# Altium PCB lab2_kondratchenko_buck_boost.PcbDoc
Units mm, origin at the board's own origin, x right, y up, seen from the top; angles counter-clockwise.
Board outline 55 x 30 mm, 2 copper layers (Top Layer, Bottom Layer), stack 1.536 mm thick; 21 components, 13 nets, 65 pads, 106 vias.
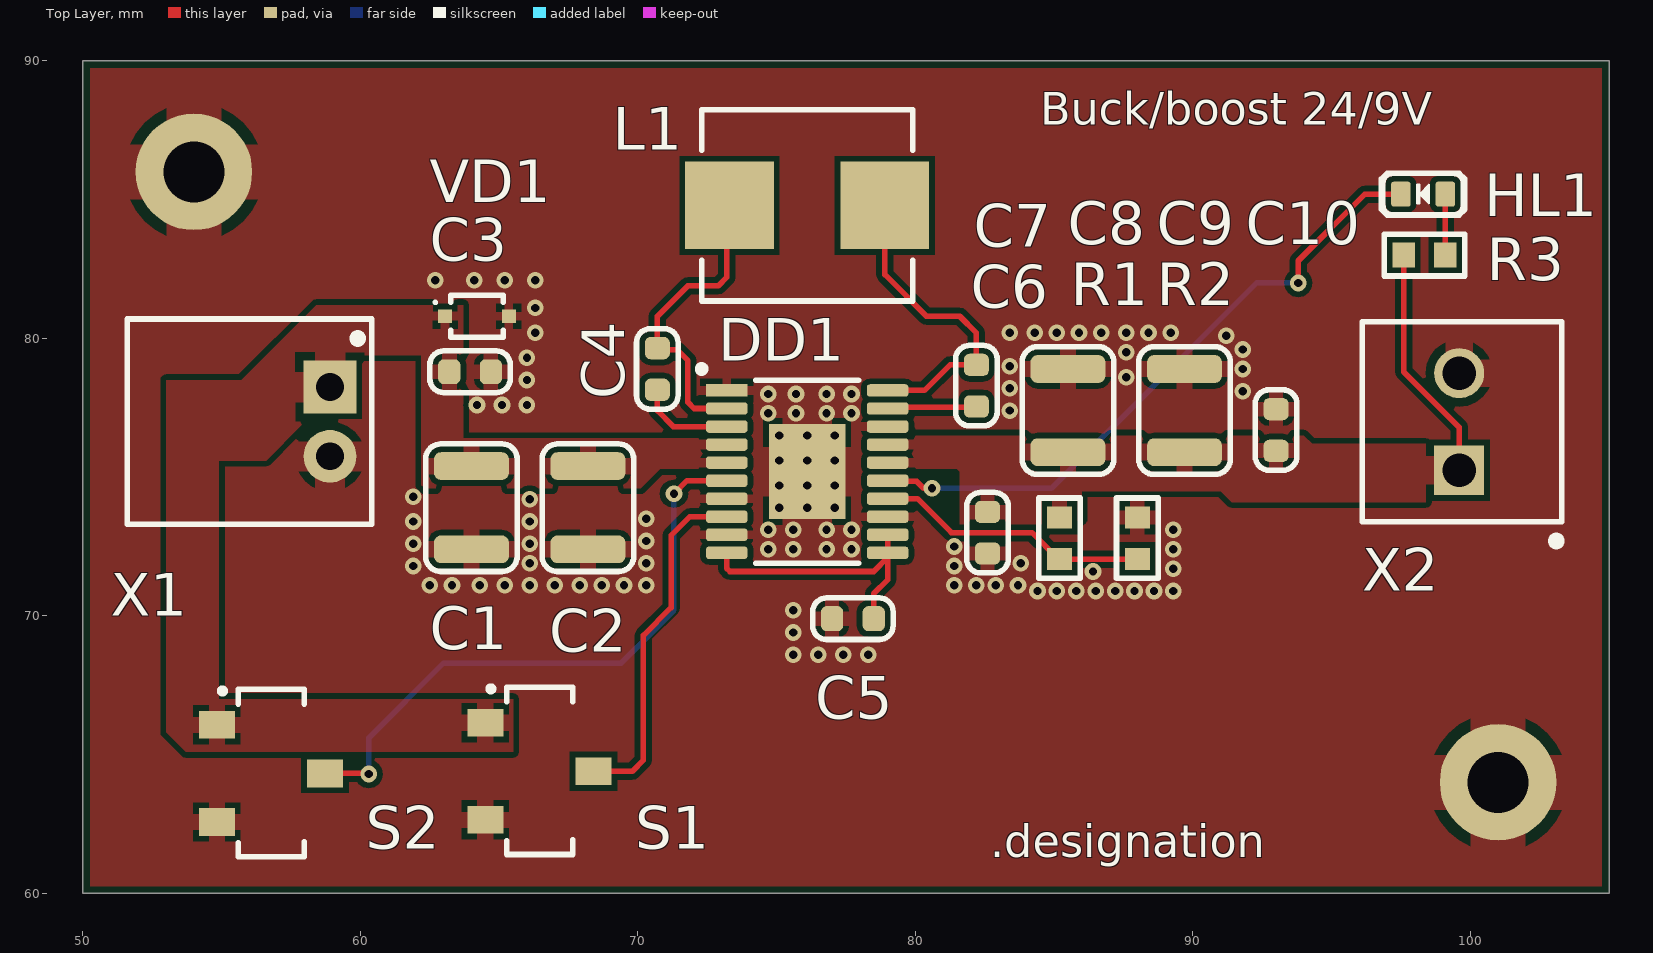
[diagram p0: Top Layer view]
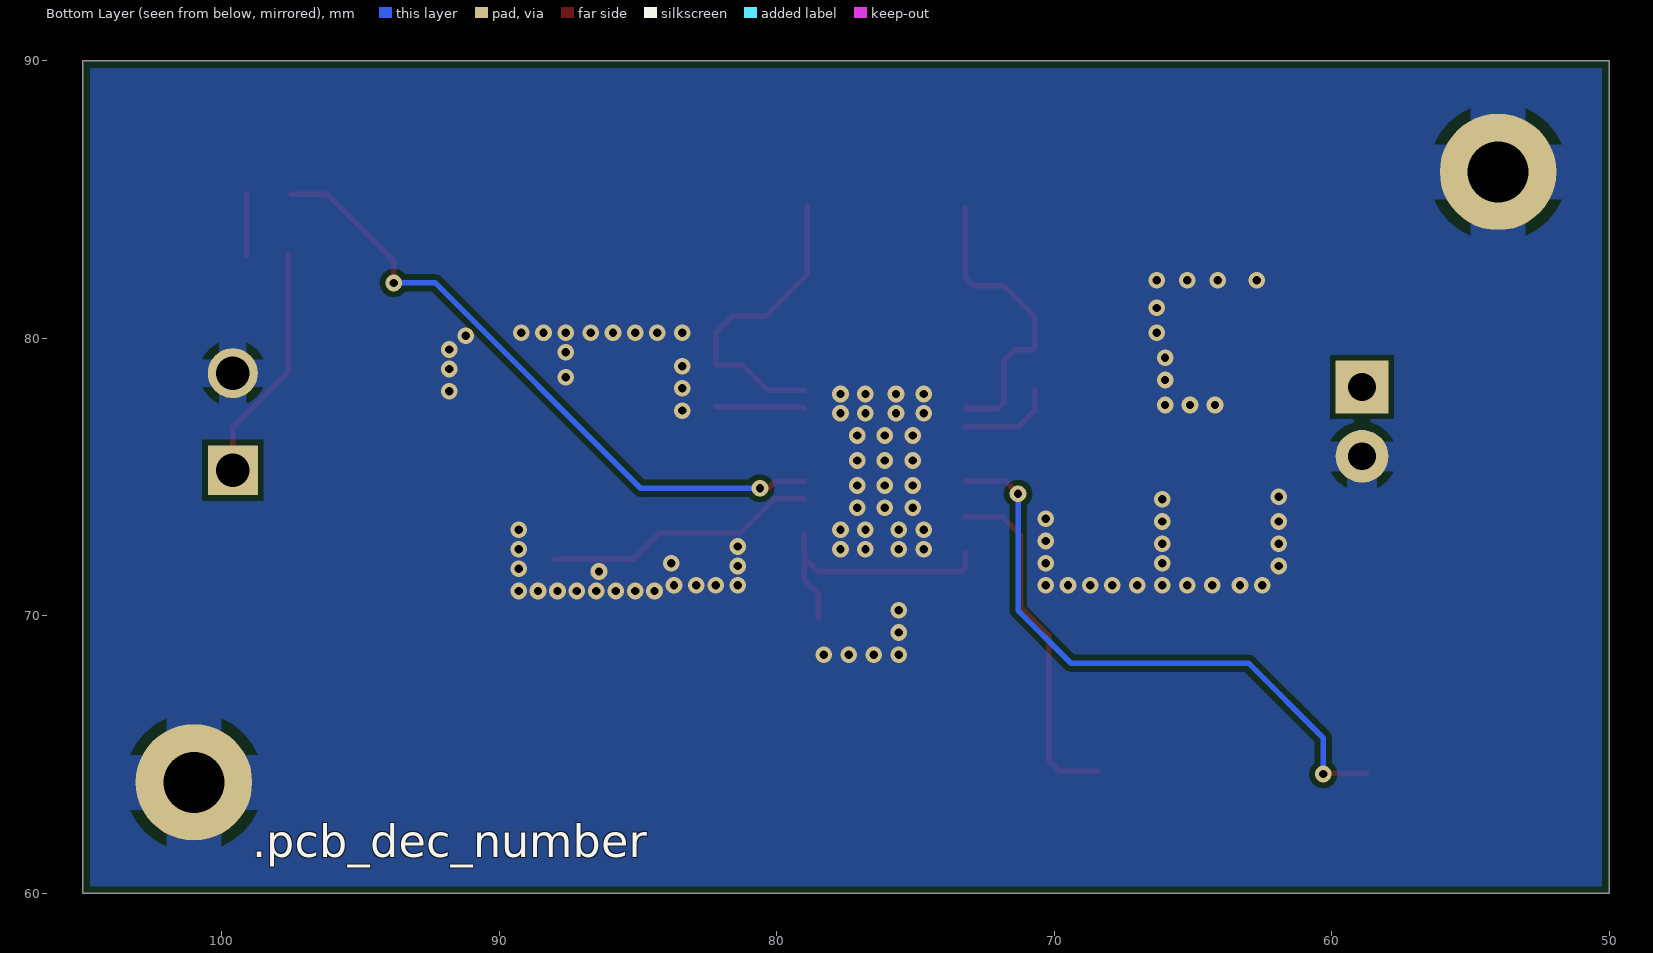
[diagram p1: Bottom Layer view, seen from below]
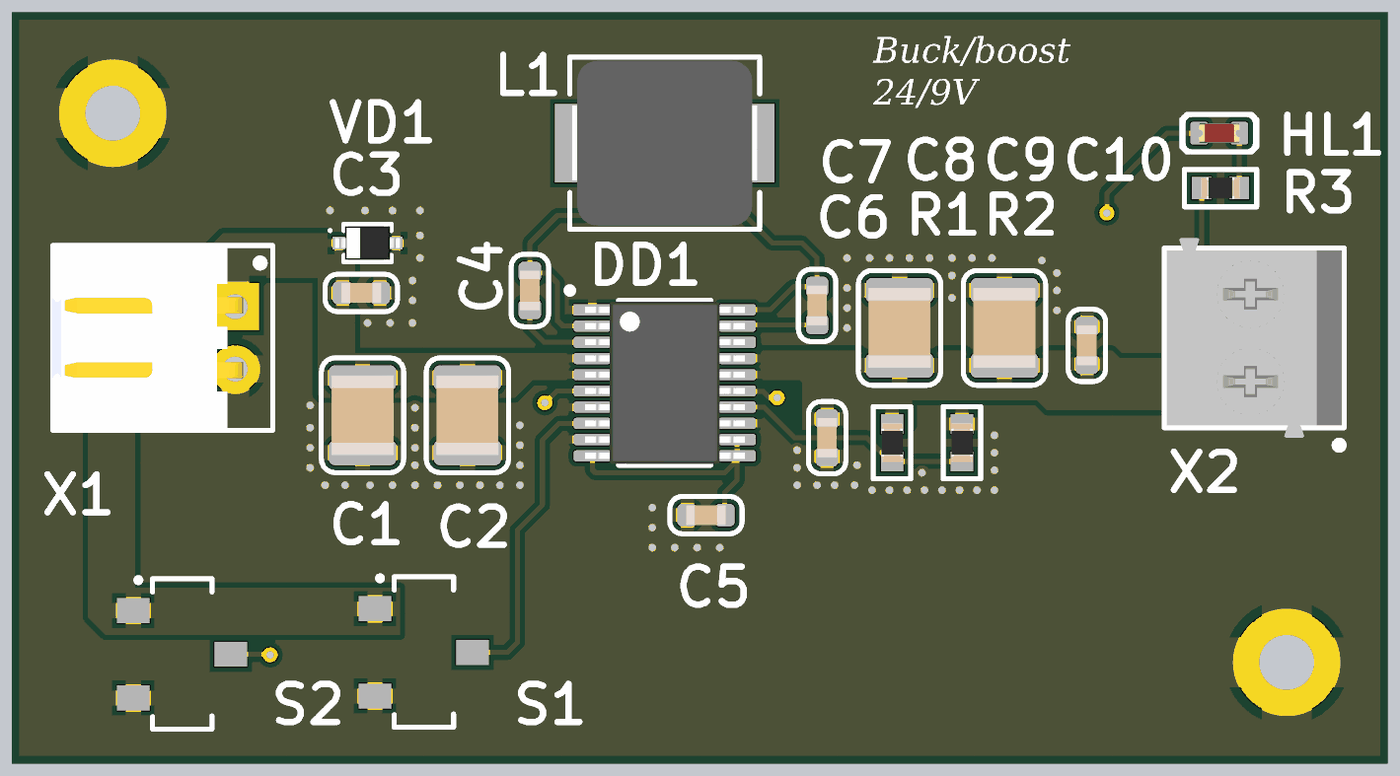
[diagram p2: 3D render of the assembled board from above, using the file's embedded part models]

## Layer stack, top to bottom
Top Solder: solder mask 0.0102, Solder Resist, Dk 3.5
Top Layer: signal copper 0.018
Core 1: core 1.5, FR4, Dk 4.6
Bottom Layer: signal copper 0.018
Bottom Solder: solder mask 0.0102, Solder Resist, Dk 3.5

## Board outline
50,90 105,90 105,60 50,60

## Design rules (kind name [scope] priority, off if disabled: settings)
AcuteAngle min_acute_angle [OnCopper] p1: minimum=3.50000000000000E+0001 checktracksonly=FALSE // Минимальный угол между примитивами топологии
BoardOutlineClearance board_outline_clearance_std [NOT (OnLayer('Bottom Overlay') OR OnLayer('Top Overlay'))] p1: gap=0.25 ignorepadtopadclearanceinfootprint=FALSE except(0: Arc-SplitContinuation Track-SplitContinuation SMDPad-SplitContinuation THPad-SplitContinuation Via-SplitContinuation Fill-SplitContinuation Poly-SplitContinuation Region-SplitContinuation Text-SplitContinuation) // Отступ элементов топологии от края фрезеруемой печатной платы
Clearance clearance_outer_18um_std [OnTopLayer OR OnBottomLayer] p1: gap=0.125 ignorepadtopadclearanceinfootprint=TRUE except(0.2: Arc-Fill Arc-Poly Track-Fill Track-Poly SMDPad-SMDPad SMDPad-Fill SMDPad-Poly THPad-Fill THPad-Poly Via-Fill Via-Poly Fill-Fill Fill-Poly Poly-Poly Poly-Region Poly-Text; 0.25: Arc-Hole Track-Hole SMDPad-Hole THPad-Hole Via-Hole Fill-Hole Poly-Hole Region-Hole Text-Hole) // Зазоры на внешних слоях
Clearance clearance_inner_18um_std [NOT (OnTopLayer Or OnBottomLayer)] p2: gap=0.125 ignorepadtopadclearanceinfootprint=FALSE except(0.2: Arc-Fill Arc-Poly Track-Fill Track-Poly SMDPad-SMDPad SMDPad-Fill SMDPad-Poly THPad-Fill THPad-Poly Via-Fill Via-Poly Fill-Fill Fill-Poly Poly-Poly Poly-Region Poly-Text; 0.25: Arc-Hole Track-Hole SMDPad-Hole THPad-Hole Via-Hole Fill-Hole Poly-Hole Region-Hole Text-Hole) // Зазоры на внутренних слоях
ComponentClearance [All] p1: gap=0 collisioncheckmode=3 verticalgap=0 showdistances=FALSE
DiffPairsRouting diff_pairs_routing [All] p1: maxlimit=0.127 minlimit=0.127 mostfreqgap=0.127 toplayer_minwidth=0.143 toplayer_maxwidth=0.143 toplayer_prefwidth=0.143 bottomlayer_minwidth=0.143 bottomlayer_maxwidth=0.143 bottomlayer_prefwidth=0.143 impedanceprofiledriven=TRUE impedanceprofileid={FD46899E-B5A2-4EF5-A302-5D2DB6A51F35} maxuncoupledlength=12.7 // Правила трассировки дифференциальных пар
HoleSize min_hole_size_std [IsPad] p1: absolutevalues=TRUE maxlimit=5.9 minlimit=0.6 maxpercent=80.000 minpercent=20.000 // Диаметр межслойного переходного отверстия
HoleSize min_hole_size_via_std [IsVia] p2: absolutevalues=TRUE maxlimit=5.9 minlimit=0.3 maxpercent=80.000 minpercent=20.000 // Минимальный диаметр монтажного отверстия
HoleToHoleClearance hole_to_hole_clearance_std [All] p1: gap=0.2 allowstackedmicrovias=FALSE // Минимальное расстояние между краями двух отверстий
MinimumAnnularRing min_via_ar_std [All] p1: minimumring=0.15 // Поясок площадки переходного отверстия (Annular ring VIA)
MinimumAnnularRing min_pad_ar_std [All] p2: minimumring=0.2 // Поясок монтажной контактной площадки (Annular ring PAD)
MinimumSolderMaskSliver min_solder_mask_bridge_std [All] p1: minsoldermaskwidth=0.15 // Мнимальная ширина масочного мостика
PlaneClearance plane_clearance_18um_std [All] p1: clearance=0.2 // Отступ полигона (для слоя plane) от элементов топологии
PlaneConnect [All] p1: planeconnectstyle=Relief reliefexpansion=0.5 reliefentries=4 reliefconductorwidth=0.2 reliefairgap=0.2
PolygonConnect poly_connect_to_pad<=0.3 [(AsMM(PadXSize_AllLayers)<=0.301) or (AsMM(PadYSize_AllLayers)<=0.301)] p1: thpad.connectstyle=Relief thpad.reliefconductorwidth=0.2 thpad.reliefentries=4 thpad.polygonreliefangle="90 Angle" thpad.airgapwidth=0.2 smdpad.connectstyle=Relief smdpad.reliefconductorwidth=0.2 smdpad.reliefentries=4 smdpad.polygonreliefangle="90 Angle" smdpad.airgapwidth=0.2 via.connectstyle=Direct via.reliefconductorwidth=0.254 via.reliefentries=4 via.polygonreliefangle="90 Angle" via.airgapwidth=0.254 // Правила подключения полигонов для падов от 0,3мм и меньше
PolygonConnect poly_connect_to_pad<=0.4 [(AsMM(PadXSize_AllLayers)<=0.401) or (AsMM(PadYSize_AllLayers)<=0.401)] p2: thpad.connectstyle=Relief thpad.reliefconductorwidth=0.26 thpad.reliefentries=4 thpad.polygonreliefangle="90 Angle" thpad.airgapwidth=0.2 smdpad.connectstyle=Relief smdpad.reliefconductorwidth=0.26 smdpad.reliefentries=4 smdpad.polygonreliefangle="90 Angle" smdpad.airgapwidth=0.2 via.connectstyle=Direct via.reliefconductorwidth=0.254 via.reliefentries=4 via.polygonreliefangle="90 Angle" via.airgapwidth=0.254 // Правила подключения полигонов для падов от 0,4 и меньше
PolygonConnect poly_connect_to_pad<=0.6 [(AsMM(PadXSize_AllLayers)<=0.601) or (AsMM(PadYSize_AllLayers)<=0.601)] p3: thpad.connectstyle=Relief thpad.reliefconductorwidth=0.33 thpad.reliefentries=4 thpad.polygonreliefangle="90 Angle" thpad.airgapwidth=0.2 smdpad.connectstyle=Relief smdpad.reliefconductorwidth=0.33 smdpad.reliefentries=4 smdpad.polygonreliefangle="90 Angle" smdpad.airgapwidth=0.2 via.connectstyle=Direct via.reliefconductorwidth=0.254 via.reliefentries=4 via.polygonreliefangle="90 Angle" via.airgapwidth=0.254 // Правила подключения полигонов для падов от 0,6мм и меньше
PolygonConnect poly_connect_to_pad<=0.7 [(AsMM(PadXSize_AllLayers)<=0.701) or (AsMM(PadYSize_AllLayers)<=0.701)] p4: thpad.connectstyle=Relief thpad.reliefconductorwidth=0.46 thpad.reliefentries=4 thpad.polygonreliefangle="90 Angle" thpad.airgapwidth=0.2 smdpad.connectstyle=Relief smdpad.reliefconductorwidth=0.46 smdpad.reliefentries=4 smdpad.polygonreliefangle="90 Angle" smdpad.airgapwidth=0.2 via.connectstyle=Direct via.reliefconductorwidth=0.254 via.reliefentries=4 via.polygonreliefangle="90 Angle" via.airgapwidth=0.254 // Правила подключения полигонов для падов от 0,7мм и меньше
PolygonConnect poly_connect_to_pad<=0.8 [(AsMM(PadXSize_AllLayers)<=0.8)or(AsMM(PadYSize_AllLayers)<=0.8)] p5: thpad.connectstyle=Relief thpad.reliefconductorwidth=0.53 thpad.reliefentries=4 thpad.polygonreliefangle="90 Angle" thpad.airgapwidth=0.3 smdpad.connectstyle=Relief smdpad.reliefconductorwidth=0.53 smdpad.reliefentries=4 smdpad.polygonreliefangle="90 Angle" smdpad.airgapwidth=0.2 via.connectstyle=Direct via.reliefconductorwidth=0.254 via.reliefentries=4 via.polygonreliefangle="90 Angle" via.airgapwidth=0.254 // Правила подключения полигонов для падов от 0,8мм и меньше
PolygonConnect poly_connect_to_pad<=1 [(AsMM(PadXSize_AllLayers)<=1.01)or(AsMM(PadYSize_AllLayers)<=1.01)] p6: thpad.connectstyle=Relief thpad.reliefconductorwidth=0.6 thpad.reliefentries=4 thpad.polygonreliefangle="90 Angle" thpad.airgapwidth=0.3 smdpad.connectstyle=Relief smdpad.reliefconductorwidth=0.6 smdpad.reliefentries=4 smdpad.polygonreliefangle="90 Angle" smdpad.airgapwidth=0.2 via.connectstyle=Direct via.reliefconductorwidth=0.254 via.reliefentries=4 via.polygonreliefangle="90 Angle" via.airgapwidth=0.254 // Правила подключения полигонов для падов от 1мм и меньше
PolygonConnect poly_connect_to_pad<=1.3 [(AsMM(PadXSize_AllLayers)<=1.31)or(AsMM(PadYSize_AllLayers)<=1.31)] p7: thpad.connectstyle=Relief thpad.reliefconductorwidth=0.66 thpad.reliefentries=4 thpad.polygonreliefangle="90 Angle" thpad.airgapwidth=0.3 smdpad.connectstyle=Relief smdpad.reliefconductorwidth=0.86 smdpad.reliefentries=4 smdpad.polygonreliefangle="90 Angle" smdpad.airgapwidth=0.2 via.connectstyle=Direct via.reliefconductorwidth=0.254 via.reliefentries=4 via.polygonreliefangle="90 Angle" via.airgapwidth=0.254 // Правила подключения полигонов для падов от 1,3мм и меньше
PolygonConnect poly_connect_to_pad<=1.6 [(AsMM(PadXSize_AllLayers)<=1.61)or(AsMM(PadYSize_AllLayers)<=1.61)] p8: thpad.connectstyle=Relief thpad.reliefconductorwidth=0.8 thpad.reliefentries=4 thpad.polygonreliefangle="90 Angle" thpad.airgapwidth=0.3 smdpad.connectstyle=Relief smdpad.reliefconductorwidth=1 smdpad.reliefentries=4 smdpad.polygonreliefangle="90 Angle" smdpad.airgapwidth=0.2 via.connectstyle=Direct via.reliefconductorwidth=0.254 via.reliefentries=4 via.polygonreliefangle="90 Angle" via.airgapwidth=0.254 // Правила подключения полигонов для падов от 1,6мм и меньше
PolygonConnect poly_connect_to_pad<=1.8 [(AsMM(PadXSize_AllLayers)<=1.8)or(AsMM(PadYSize_AllLayers)<=1.8)] p9: thpad.connectstyle=Relief thpad.reliefconductorwidth=1 thpad.reliefentries=4 thpad.polygonreliefangle="90 Angle" thpad.airgapwidth=0.3 smdpad.connectstyle=Relief smdpad.reliefconductorwidth=1.2 smdpad.reliefentries=4 smdpad.polygonreliefangle="90 Angle" smdpad.airgapwidth=0.2 via.connectstyle=Direct via.reliefconductorwidth=0.254 via.reliefentries=4 via.polygonreliefangle="90 Angle" via.airgapwidth=0.254 // Правила подключения полигонов для падов от 1,8мм и меньше
PolygonConnect poly_connect_to_pad<=2 [(AsMM(PadXSize_AllLayers)<=2.01)or(AsMM(PadYSize_AllLayers)<=2.01)] p10: thpad.connectstyle=Relief thpad.reliefconductorwidth=1.1 thpad.reliefentries=4 thpad.polygonreliefangle="90 Angle" thpad.airgapwidth=0.3 smdpad.connectstyle=Relief smdpad.reliefconductorwidth=1.4 smdpad.reliefentries=4 smdpad.polygonreliefangle="90 Angle" smdpad.airgapwidth=0.2 via.connectstyle=Direct via.reliefconductorwidth=0.254 via.reliefentries=4 via.polygonreliefangle="90 Angle" via.airgapwidth=0.254 // Правила подключения полигонов для падов от 2мм и меньше
PolygonConnect poly_connect_to_pad<=2.3 [(AsMM(PadXSize_AllLayers)<=2.31)or(AsMM(PadYSize_AllLayers)<=2.31)] p11: thpad.connectstyle=Relief thpad.reliefconductorwidth=1.2 thpad.reliefentries=4 thpad.polygonreliefangle="90 Angle" thpad.airgapwidth=0.3 smdpad.connectstyle=Relief smdpad.reliefconductorwidth=1.4 smdpad.reliefentries=4 smdpad.polygonreliefangle="90 Angle" smdpad.airgapwidth=0.2 via.connectstyle=Direct via.reliefconductorwidth=0.254 via.reliefentries=4 via.polygonreliefangle="90 Angle" via.airgapwidth=0.254 // Правила подключения полигонов для падов от 2,3мм и меньше
PolygonConnect poly_connect_to_pad<=2.5 [(AsMM(PadXSize_AllLayers)<=2.51)or(AsMM(PadYSize_AllLayers)<=2.51)] p12: thpad.connectstyle=Relief thpad.reliefconductorwidth=1.2 thpad.reliefentries=4 thpad.polygonreliefangle="90 Angle" thpad.airgapwidth=0.3 smdpad.connectstyle=Relief smdpad.reliefconductorwidth=1.4 smdpad.reliefentries=4 smdpad.polygonreliefangle="90 Angle" smdpad.airgapwidth=0.2 via.connectstyle=Direct via.reliefconductorwidth=0.254 via.reliefentries=4 via.polygonreliefangle="90 Angle" via.airgapwidth=0.254 // Правила подключения полигонов для падов от 2,5мм и меньше
PolygonConnect poly_connect_to_pad<=2.7 [(AsMM(PadXSize_AllLayers)<=2.71)or(AsMM(PadYSize_AllLayers)<=2.71)] p13: thpad.connectstyle=Relief thpad.reliefconductorwidth=1.4 thpad.reliefentries=4 thpad.polygonreliefangle="90 Angle" thpad.airgapwidth=0.3 smdpad.connectstyle=Relief smdpad.reliefconductorwidth=1.6 smdpad.reliefentries=4 smdpad.polygonreliefangle="90 Angle" smdpad.airgapwidth=0.2 via.connectstyle=Direct via.reliefconductorwidth=0.254 via.reliefentries=4 via.polygonreliefangle="90 Angle" via.airgapwidth=0.254 // Правила подключения полигонов для падов от 2,7мм и меньше
PolygonConnect poly_connect_to_pad<=3 [(AsMM(PadXSize_AllLayers)<=3.01)or(AsMM(PadYSize_AllLayers)<=3.01)] p14: thpad.connectstyle=Relief thpad.reliefconductorwidth=1.6 thpad.reliefentries=4 thpad.polygonreliefangle="90 Angle" thpad.airgapwidth=0.3 smdpad.connectstyle=Relief smdpad.reliefconductorwidth=1.8 smdpad.reliefentries=4 smdpad.polygonreliefangle="90 Angle" smdpad.airgapwidth=0.2 via.connectstyle=Direct via.reliefconductorwidth=0.254 via.reliefentries=4 via.polygonreliefangle="90 Angle" via.airgapwidth=0.254 // Правила подключения полигонов для падов от 3мм и меньше
PolygonConnect poly_connect_to_pad<=7 [(AsMM(PadXSize_AllLayers)<7.01)or(AsMM(PadYSize_AllLayers)<=7.01)] p15: thpad.connectstyle=Relief thpad.reliefconductorwidth=2 thpad.reliefentries=4 thpad.polygonreliefangle="90 Angle" thpad.airgapwidth=0.4 smdpad.connectstyle=Relief smdpad.reliefconductorwidth=2 smdpad.reliefentries=4 smdpad.polygonreliefangle="90 Angle" smdpad.airgapwidth=0.3 via.connectstyle=Direct via.reliefconductorwidth=0.254 via.reliefentries=4 via.polygonreliefangle="90 Angle" via.airgapwidth=0.254 // Правила подключения полигонов для падов от 7мм и меньше
PolygonConnect poly_connect_to_pad [All] p16: thpad.connectstyle=Relief thpad.reliefconductorwidth=0.25 thpad.reliefentries=4 thpad.polygonreliefangle="90 Angle" thpad.airgapwidth=0.2 smdpad.connectstyle=Relief smdpad.reliefconductorwidth=0.25 smdpad.reliefentries=4 smdpad.polygonreliefangle="90 Angle" smdpad.airgapwidth=0.2 via.connectstyle=Direct via.reliefconductorwidth=0.25 via.reliefentries=4 via.polygonreliefangle="90 Angle" via.airgapwidth=0.2 // Правила подключения полигонов общие
RoomDefinition lab2_kondratchenko_buck_boost [InComponentClass('lab2_kondratchenko_buck_boost')] p1: confinementstyle=ConfineIn formatcopy=TRUE lockcomponents=FALSE outline 0,0 50.8,0 50.8,25.4 0,25.4
RoutingCorners [All] p1 off: cornerstyle=45-Degree minsetback=2.5 maxsetback=2.5
RoutingVias [All] p1: holewidth=0.3 width=0.6 viastyle="Through Hole" minholewidth=0.3 minwidth=0.6 maxholewidth=5.9 maxwidth=6.4
SilkToSilkClearance silk_to_silk_clearance_std [All] p1 off: silktosilkclearance=0.15 // Отступ текста шелкографии от других примитивов шелкографии
SilkToSolderMaskClearance silk_to_solder_mask_clearance_std [IsPad] p1 off: minsilkscreentomaskgap=0.15 clearancetoexposedcopper=FALSE // Минимальное расстояние между элементами шелкографии и вскрытой медью
SolderMaskExpansion solder_mask_expansion_std [All] p1: expansion=0.05 // Припуск паяльной масски
UnRoutedNet [All] p1: checkbadconnections=TRUE
Width width_18um_std [All] p1: maxlimit=10 minlimit=0.125 preferedwidth=0.15 checkconnectedcopper=TRUE // Ширина проводников (общая)
19 further rules are at their usual default settings.

## Components (designator, comment, footprint, x,y, rotation, side; value= is the part's Value field where it differs from the comment)
C1 "10 мк" C1210 64,73.9 r90 top
C2 "10 мк" C1210 68.2,73.9 r90 top
C3 "0,47 мк" C0603 63.95,78.8 r180 top
C4 "0,1 мк" C0603 70.7,78.9 r90 top
C5 "4,7 мк" C0603 77.75,69.9 r180 top
C6 "0,1 мк" C0603 82.6,73 r90 top
C7 "0,1 мк" C0603 82.2,78.3 r90 top
C8 "22 мк" C1210 85.5,77.4 r270 top
C9 "22 мк" C1210 89.7,77.4 r270 top
C10 "2,2 мк" C0603 93,76.7 r270 top
DD1 "TPS55162QPWPRQ1" HTSSOP-20-P65-650X440X120-L63X25-T343X275 76.1,75.2 r0 top
HL1 "TLMG1100-GS08" HL0603 98.3,85.2 r0 top
L1 "SRP7028A-4R7M" SRP-2-730X660X280 76.1,84.8 r0 top
R1 "205 к" R0603 85.2,72.8 r270 top
R2 "20 к" R0603 88,72.8 r270 top
R3 "100 к" R0603 98.35,83 r180 top
S1 "TDD01H0SB1R" TDD01H0SB1R 66.475,64.376 r0 top
S2 "TDD01H0SB1R" TDD01H0SB1R 56.8,64.3 r0 top
VD1 "SD24C-01FTG" SOD-323-257X130X114 64.2,80.8 r0 top
X1 "DS1023-1x2SF11" DS1069-2MRW6XB 56,77 r270 top
X2 "1776275-2" 1776275-2 99.7,77 r90 top

## Footprints (in the part's own frame and the unit in brackets; to place one, negate y for a bottom-side part, rotate by r counter-clockwise, add the part's x,y. Pads: shape width x height; smd on the part's side, far side on the other; paste and mask are expansions set on the pad)
1776275-2 [mm] "PCB Terminal Blocks, Header, Wire-to-Board, 2 Pins, 3.5mm, 1 Row, Side Wire Entry Angle, 26 – 18AWG Wire Size"
  rect 1.8x1.8 hole 1.2: 1(-1.75,0.1)
  round 1.8 hole 1.2: 2(1.75,0.1)
  silkscreen extent -4.3,-3.6 3.6,3.6, body extent -4,-3.5 4,3.5, height 8.3
C0603 [mm] "Chip Capacitor, 2-Leads, Body 1,60x0,80mm, IPC Medium Density"
  rrect50% 0.8x0.9 smd: 1(-0.75,0) 2(0.75,0)
  silkscreen extent -1.45,-0.75 1.45,0.75, body extent -0.8,-0.4 0.8,0.4, height 0.8
C1210 [mm] "Chip Capacitor, 2-Leads, Body 3,20x2,50mm, IPC Medium Density"
  rrect50% 1x2.7 smd: 1(-1.5,0) 2(1.5,0)
  silkscreen extent -2.3,-1.65 2.3,1.65, body extent -1.6,-1.25 1.6,1.25, height 0.78
DS1069-2MRW6XB [mm] "CWF 2 Pins Plug Header, Pitch 2,5mm, R/A Type, Type B"
  rect 1.9x1.9 hole 1: 1(-1.25,2.9)
  round 1.9 hole 1: 2(1.25,2.9)
  silkscreen extent -3.7,-4.4 3.7,4.4, body extent -3.7,-4.42 3.7,3.22, height 5.75
HL0603 [mm] "Chip Resistor, 2-Leads, Body 1,60x0,80mm, IPC Medium Density"
  rrect25% 0.7x0.9 smd: 1(-0.8,0) 2(0.8,0)
  silkscreen extent -1.5,-0.75 1.5,0.75, body extent -0.81,-0.4 0.81,0.4, height 0.64
HTSSOP-20-P65-650X440X120-L63X25-T343X275 [mm] "TSOP, 20-Leads, Body 6,50x4,40mm, Pitch 0,65mm, Thermal Pad 3.43x2.75mm, IPC Medium Density"
  rect 2.75x3.43 smd: 0(0,0)
  rect 1.5x0.45 smd: 1(-2.9,2.925)
  rrect50% 1.5x0.45 smd: 2(-2.9,2.275) 3(-2.9,1.625) 4(-2.9,0.975) 5(-2.9,0.325) 6(-2.9,-0.325) 7(-2.9,-0.975) 8(-2.9,-1.625) 9(-2.9,-2.275) 10(-2.9,-2.925) 11(2.9,-2.925) 12(2.9,-2.275) 13(2.9,-1.625) 14(2.9,-0.975) 15(2.9,-0.325) 16(2.9,0.325) 17(2.9,0.975) 18(2.9,1.625) 19(2.9,2.275) 20(2.9,2.925)
  silkscreen extent -3.92,-3.3 1.85,3.82, body extent -3.2,-3.25 3.2,3.25, height 1.13
R0603 [mm] "Chip Resistor, 2-Leads, Body 1,60x0,80mm, IPC Medium Density"
  rect 0.8x0.9 smd: 1(-0.75,0) 2(0.75,0)
  silkscreen extent -1.45,-0.75 1.45,0.75, body extent -0.77,-0.43 0.78,0.43, height 0.43
SOD-323-257X130X114 [mm] "SOD, 2-Leads, Body 2,57x1,30mm, IPC Medium Density"
  rect 0.5x0.5 smd: 1(-1.15,0) 2(1.15,0)
  silkscreen extent -1.55,-0.75 0.95,0.75, body extent -1.3,-0.67 1.3,0.68, height 1.1
SRP-2-730X660X280 [mm] "Precision Wire Wound Inductor, 2-Leads, Body 7,30x6,60mm, IPC Medium Density"
  rect 3.2x3.15 smd: 1(-2.8,0) 2(2.8,0)
  silkscreen extent -3.8,-3.45 3.8,3.45, body extent -3.7,-3.3 3.7,3.3, height 3
TDD01H0SB1R [mm]
  rect 1.3x1 smd: 1(-1.975,1.774) 2(-1.975,-1.726) 3(1.925,0.024)
  silkscreen extent -1.87,-2.98 1.17,3.09, body extent -2.12,-2.98 2.08,3.02, height 2.29

## Part data
C1 C2: library part c0153, "=Описание", HelpURL=https://www.yageo.com/upload/media/product/productsearch/datasheet/mlcc/UPY-GPHC_X7R_6.3V-to-50V_20.pdf, ID=c0153, Корпус=1210, Наименование=CC1210KKX7R9BB106, Напряжение="50 В", Номинал="10 мк", Номинальное напряжение="50 В", Описание="Конденсатор керамический чип 1210 10 мкФ 50 В ±10 %", Отклонение="±10 %", Производитель="YAGEO Corp.", Рабочие температуры="от –55 °С до +125 °С", Температурный коэффициент емкости=X7R, Фамилия=Паньков
C3: library part c0108, "=Описание", HelpURL=https://www.yageo.com/upload/media/product/productsearch/datasheet/mlcc/UPY-GPHC_X5R_4V-to-50V_26.pdf, ID=c0108, Корпус=0603, Наименование=CC0603KRX5R9BB474, Напряжение="50 В", Номинал="0,47 мк", Номинальное напряжение="50 В", Описание="Конденсатор керамический чип 0603 470 нФ 50 В ±10 %", Отклонение="±10 %", Производитель="YAGEO Corp.", Рабочие температуры="от –55 °С до +85 °С", Температурный коэффициент емкости=X5R, Фамилия=Паньков
C4 C6 C7: library part c0087, "=Описание", HelpURL=https://www.yageo.com/upload/media/product/productsearch/datasheet/mlcc/UPY-GPHC_X7R_6.3V-to-50V_20.pdf, ID=c0087, Корпус=0603, Наименование=CC0603JRX7R9BB104, Напряжение="50 В", Номинал="0,1 мк", Номинальное напряжение="50 В", Описание="Конденсатор керамический чип 0603 100 нФ 50 В ±5 %", Отклонение="±5 %", Производитель="YAGEO Corp.", Рабочие температуры="от –55 °С до +125 °С", Температурный коэффициент емкости=X7R, Фамилия=Ларионов
C5: library part c0138, "=Описание", HelpURL=https://www.yageo.com/upload/media/product/productsearch/datasheet/mlcc/UPY-GPHC_X5R_4V-to-50V_26.pdf, ID=c0138, Корпус=0603, Наименование=CC0603KRX5R8BB475, Напряжение="25 В", Номинал="4,7 мк", Номинальное напряжение="25 В", Описание="Конденсатор керамический чип 0603 4,7 мкФ 25 В ±10 %", Отклонение="±10 %", Производитель="YAGEO Corp.", Рабочие температуры="от –55 °С до +85 °С", Температурный коэффициент емкости=X5R, Фамилия=Ларионов
C8 C9: library part c0167, "=Описание", HelpURL=https://www.yageo.com/upload/media/product/productsearch/datasheet/mlcc/UPY-GPHC_X7R_6.3V-to-50V_20.pdf, ID=c0167, Корпус=1210, Наименование=CC1210KKX7R8BB226, Напряжение="25 В", Номинал="22 мк", Номинальное напряжение="25 В", Описание="Конденсатор керамический чип 1210 22 мкФ 25 В ±10 %", Отклонение="±10 %", Производитель="YAGEO Corp.", Рабочие температуры="от –55 °С до +125 °С", Температурный коэффициент емкости=X7R, Фамилия=Ляпцев
C10: library part c0124, "=Описание", HelpURL=https://www.yageo.com/upload/media/product/productsearch/datasheet/mlcc/UPY-GPHC_X7R_6.3V-to-50V_20.pdf, ID=c0124, Корпус=0603, Наименование=CC0603KRX7R6BB225, Напряжение="10 В", Номинал="2,2 мк", Номинальное напряжение="10 В", Описание="Конденсатор керамический чип 0603 2,2 мкФ 10 В ±10 %", Отклонение="±10 %", Производитель="YAGEO Corp.", Рабочие температуры="от –55 °С до +125 °С", Температурный коэффициент емкости=X7R, Фамилия=Чернов
DD1: library part dd0025, "=Описание", HelpURL=https://www.ti.com/product/TPS55162-Q1, ID=dd0025, Входное напряжение="от 3,6 В до 36 В", Выходное напряжение="от 5,7 В до 9,0 В", Коммутируемый ток="до 1,0 А", Корпус=HTSSOP-20, Наименование=TPS55162QPWPRQ1, Описание="Повышающий/понижающий преобразователь напряжения 3,6 .. 36 / 5,7 В / 9 В и 1,0 А", Производитель="Texas Instruments Inc.", Рабочие температуры="от –40 °С до +125 °С", Фамилия=Кондратченко, Частота переключения="2,0 МГц"
HL1: library part hl0005, "=Описание", HelpURL=https://www.vishay.com/leds/list/product-83173/, ID=hl0005, Корпус=0603, Наименование=TLMG1100-GS08, Номинальная длина волны="570 нм", Номинальная сила света="35 мкд", Номинальное падение напряжения="2,1 В", Номинальный прямой ток="30 мА", Описание="Светодиод чип 0603 зеленый", Производитель="Vishay Intertechnology, Inc.", Рабочие температуры="от –40 °С до +100 °С", Рассеиваемая мощность="90 мВт", Фамилия=Ларионов, Цвет=Зеленый
L1: library part l0007, "=Описание", HelpURL=https://www.bourns.com/products/magnetic-products/power-inductors-aec-q200-compliant/product/SRP7028A, ID=l0007, Индуктивность="4,7 мкГн", Корпус="7,3 x 6,6 x 2,8", Максимальное активное сопротивление="40 мОм", Наименование=SRP7028A-4R7M, Номинал="4,7 мкГн", Номинальное активное сопротивление="37 мОм", Номинальный ток (при нагреве на 20 °С/40 °С)="5,5 А", Описание="Катушка индуктивности 4,7 мкГн ±20 %", Отклонение="±20 %", Производитель="Bourns, Inc.", Рабочее напряжение="не указано", Рабочие температуры="от –55 °С до +150 °С", Резонансная частота="21 МГц", Ток насыщения="10 А", Фамилия=Игнатова
R1: library part r0204, "=Описание", HelpURL=https://www.yageo.com/upload/media/product/productsearch/datasheet/rchip/PYu-RC_Group_51_RoHS_L_11.pdf, ID=r0204, Корпус=0603, Наименование=RC0603FR-07205KL, Номинал="205 к", Номинальное напряжение="75 В", Номинальный ток="1 А", Описание="Резистор чип 0603 205 кОм ±1 % 0,1 Вт", Отклонение="±1 %", Производитель="YAGEO Corp.", Рабочие температуры="от –55 °С до +155 °С", Фамилия=Кондратченко
R2: library part r0115, "=Описание", HelpURL=https://www.yageo.com/upload/media/product/productsearch/datasheet/rchip/PYu-RC_Group_51_RoHS_L_11.pdf, ID=r0115, Корпус=0603, Наименование=RC0603FR-0720KL, Номинал="20 к", Номинальное напряжение="75 В", Номинальный ток="1 А", Описание="Резистор чип 0603 20 кОм ±1 % 0,1 Вт", Отклонение="±1 %", Примечание="Ряд E24", Производитель="YAGEO Corp.", Рабочие температуры="от –55 °С до +155 °С", Фамилия=Паньков
R3: library part r0141, "=Описание", HelpURL=https://www.yageo.com/upload/media/product/productsearch/datasheet/rchip/PYu-RC_Group_51_RoHS_L_11.pdf, ID=r0141, Корпус=0603, Наименование=RC0603FR-07100KL, Номинал="100 к", Номинальное напряжение="75 В", Номинальный ток="1 А", Описание="Резистор чип 0603 100 кОм ±1 % 0,1 Вт", Отклонение="±1 %", Примечание="Ряд E24", Производитель="YAGEO Corp.", Рабочие температуры="от –55 °С до +155 °С", Фамилия=Водорезов
S1 S2: library part s0008, "=Описание", HelpURL=https://www.ckswitches.com/products/switches/product-details/DIP/TDD/TDD01H0SB1R/, ID=s0008, Количество контактов=3, Корпус="6,00 х 4,20 х 2,30", Наименование=TDD01H0SB1R, Описание="2-х позиционный движковый переключатель", Производитель=C&K, Промывка=Запрещена, Рабочие температуры="от –40 °С до +85 °С", Сопротивление контакта="100 мОм", Ток нагрузки="25 мА @ 24 В", Фамилия=Игнатова
VD1: library part vd0007, "=Описание", HelpURL=https://www.littelfuse.com/products/tvs-diode-arrays/general-purpose-esd-protection/sdc/sd24c_01ftg.aspx, ID=vd0007, Корпус=SOD-323, Наименование=SD24C-01FTG, Описание="Двунаправленная диодная сборка для подавления помех 24 В", Производитель="Littelfuse, Inc.", Фамилия=Игнатова
X1: library part x0039, "=Описание", Contact_1=Contact_1, Contact_2=Contact_2, HelpURL=http://en.connfly.group/product/xVkr=EusQssAN0gN=Aos=mU+UrVkR9kqEAN0gN0MUR+g+NB+A, ID=x0039, Наименование=DS1069-2MRW6XB, Описание="CWF 2 pin Type B 2,5 мм вилка угловой", Производитель="Connfly Electronic Co., Ltd.", Фамилия=Ларионов
X2: library part x0008, "=Описание", Contact_1=Contact_1, Contact_2=Contact_2, HelpURL=https://www.te.com/usa-en/product-1776275-2.html, ID=x0008, Наименование=1776275-2, Описание="Terminal Block 2 pin 3,5 мм", Производитель="TE Connectivity", Фамилия=Паньков

## Free pads (board coordinates)
  round 4.2 hole 2.2: 3(54,86) 3(101,64)

## Via types
v1: diameter 0.6, hole 0.3, Top Layer to Bottom Layer, tented both sides, 90 vias
v2: diameter 0.6, hole 0.3, Top Layer to Bottom Layer, 16 vias

## Nets (pads, with @x,y where several pads share a name; then routed paths per layer and width w, separated by ;. In a path a pad name is that pad's centre, name@x,y a point inside that pad or via, vN(x,y) a via of type N, cw(c..) or ccw(c..) an arc to the next point about the centre after c; other vN are vias at no path point)
9V_OUT: C6.2 C8.2 C9.2 C10.2 DD1.16 DD1.17 R1.1 R3.2 X2.1 | length 8.6
  Top Layer w0.2: R3.2 97.6,78.8 99.6,76.8 X2.1
24V_IN: C1.2 C2.2 C3.2 DD1.4 DD1.5 S1.1 S2.1 VD1.1 X1.1
GND: C1.1 C2.1 C3.1 C5.2 C6.1 C8.1 C9.1 C10.1 DD1.0 DD1.1 DD1.7 DD1.9 DD1.13 DD1.18 pad.3 R2.1 S1.2 S2.2 VD1.2 X1.2 X2.2
  other v1: 75.6,68.6 76.5,68.6 77.4,68.6 78.3,68.6 75.6,69.4 75.6,70.2 84.4,70.9 85.1,70.9 85.8,70.9 86.5,70.9 87.2,70.9 87.9,70.9 88.6,70.9 89.3,70.9 62.5,71.1 63.3,71.1 64.3,71.1 65.2,71.1 66.1,71.1 67,71.1 67.9,71.1 68.7,71.1 69.5,71.1 70.3,71.1 81.4,71.1 82.2,71.1 82.9,71.1 83.7,71.1 86.4,71.6 89.3,71.7 61.9,71.8 81.4,71.8 66.1,71.9 70.3,71.9 83.8,71.9 74.7,72.4 75.6,72.4 76.8,72.4 77.7,72.4 89.3,72.4 81.4,72.5 61.9,72.6 66.1,72.6 70.3,72.7 74.7,73.1 75.6,73.1 76.8,73.1 77.7,73.1 89.3,73.1 61.9,73.4 66.1,73.4 70.3,73.5 66.1,74.2 61.9,74.3 74.7,77.3 75.7,77.3 76.8,77.3 77.7,77.3 83.4,77.4 64.2,77.6 65.1,77.6 66,77.6 74.7,78 75.7,78 76.8,78 77.7,78 91.8,78.1 83.4,78.2 66,78.5 87.6,78.6 91.8,78.9 83.4,79 66,79.3 87.6,79.5 91.8,79.6 91.2,80.1 66.3,80.2 83.4,80.2 84.3,80.2 85.1,80.2 85.9,80.2 86.7,80.2 87.6,80.2 88.4,80.2 89.2,80.2 66.3,81.1 62.7,82.1 64.1,82.1 65.2,82.1 66.3,82.1
  other v2: 75.1,73.9 76.1,73.9 77.1,73.9 75.1,74.7 76.1,74.7 77.1,74.7 75.1,75.6 76.1,75.6 77.1,75.6 75.1,76.5 76.1,76.5 77.1,76.5
IGN: DD1.6 S2.3 | length 22.1
  Top Layer w0.2: S2.3 60.276,64.324 v2(60.3,64.3) ; v2(71.3,74.4) 71.775,74.875 DD1.6
  Bottom Layer w0.2: v2(60.3,64.3) 60.3,65.6 63,68.3 69.4,68.3 71.3,70.2 v2(71.3,74.4)
IGN_PWRL: DD1.8 S1.3 | length 12.8
  Top Layer w0.2: S1.3 69.8,64.4 70.2,64.8 70.2,69.3 71.2,70.3 71.2,72.9 71.875,73.575 DD1.8 DD1.8@73.175,73.6
NetC4_1: C4.1 DD1.3 | length 3.5
  Top Layer w0.2: C4.1 70.7,77.4 71.275,76.825 DD1.3
NetC4_2: C4.2 DD1.2 L1.1 | length 11.1
  Top Layer w0.2: DD1.2@73.125,77.55 DD1.2 72.025,77.475 71.8,77.7 71.8,79.2 71.4,79.6 70.75,79.6 C4.2 70.7,80.8 71.8,81.9 72.9,81.9 73.2,82.2 L1.1@73.2,84.7
NetC5_1: C5.1 DD1.10 DD1.11 DD1.12 | length 9.8
  Top Layer w0.2: DD1.10 73.2,71.717 73.317,71.6 78.5,71.6 DD1.11@79,72.1 ; C5.1 78.5,70.8 79,71.3 DD1.11@79,72.1 ; DD1.12 DD1.11 DD1.11@79,72.1
NetC7_1: C7.1 DD1.19 | length 3.2
  Top Layer w0.2: DD1.19 79.037,77.512 82.163,77.512 C7.1
NetC7_2: C7.2 DD1.20 L1.2 | length 11.4
  Top Layer w0.2: L1.2 78.9,82.3 80.4,80.8 81.6,80.8 82.2,80.2 C7.2 81.25,79.05 80.325,78.125 DD1.20
NetHL1_2: HL1.2 R3.1 | length 2.2
  Top Layer w0.2: R3.1 HL1.2
PG: DD1.15 HL1.1 | length 23.5
  Top Layer w0.2: DD1.15 79.025,74.85 80.05,74.85 80.3,74.6 v2(80.6,74.6) ; v2(93.8,82) 93.8,82.8 96.2,85.2 HL1.1
  Bottom Layer w0.2: v2(80.6,74.6) 84.9,74.6 92.3,82 v2(93.8,82)
VOS_FB: DD1.14 R1.2 R2.2 | length 9.9
  Top Layer w0.2: DD1.14 80.075,74.225 81.3,73 84.2,73 85.15,72.05 R1.2 R2.2

## Polygon pours and split planes (outlines as drawn)
GND on Top Layer "Top Layer-GND" (solid, pour order 24): 50,90 105,90 105,60 50,60
9V_OUT on Top Layer "9V_OUT_L01_P020" (solid, pour order 20): 78.2,76.5 94,76.5 94.3,76.2 100.6,76.2 100.6,74.1 91.4,74.1 91,74.5 86,74.5 86,73.3 85.9,73.3 81.6,73.3 81.6,75.2 81.5,75.3 78.2,75.3
24V_IN on Top Layer "24V_IN_L01_P018" (solid, pour order 18): 65.5,67 54.9,67 54.9,67.2 54.9,75.6 56.6,75.6 58.3,77.3 59.4,77.3 59.4,79.4 62.2,79.4 62.2,74.6 70.1,74.6 70.8,75.3 74,75.3 74,76.3 73.9,76.4 70.7,76.4 63.7,76.4 63.7,81.2 58.4,81.2 55.7,78.5 53,78.5 53,65.8 53.7,65.1 65.5,65.1
GND on Bottom Layer "Bottom Layer-GND" (solid, pour order 26): 50,90 105,90 105,60 50,60

## Silkscreen, mask and mechanical layers (free items; w line width, h text height)
Top Overlay:
  text "Buck/boost 24/9V" at 84.5,87.3 h2
  text ".designation" at 82.7,60.9 h2
Bottom Overlay:
  text ".pcb_dec_number" at 98.9,60.9 h2
Board:
  lines w0.1: 105,65 105,60 50,60 50,90 105,90 105,65 ; 105,65 105,65
Assembly Notes (Mech5):
  text "'.title'" at 50,57.5 h2
  text "'.project'_'.pcb_dec_number'['.Pcb_File_Name_No_Path']" at 50,55 h2